# Altium PCB 12zb.PcbDoc
Units mil, origin at the board's own origin, x right, y up, seen from the top; angles counter-clockwise.
Board outline 2485 x 2100 mil, 2 copper layers (Top Layer, Bottom Layer); 77 components, 107 nets, 329 pads, 73 vias.
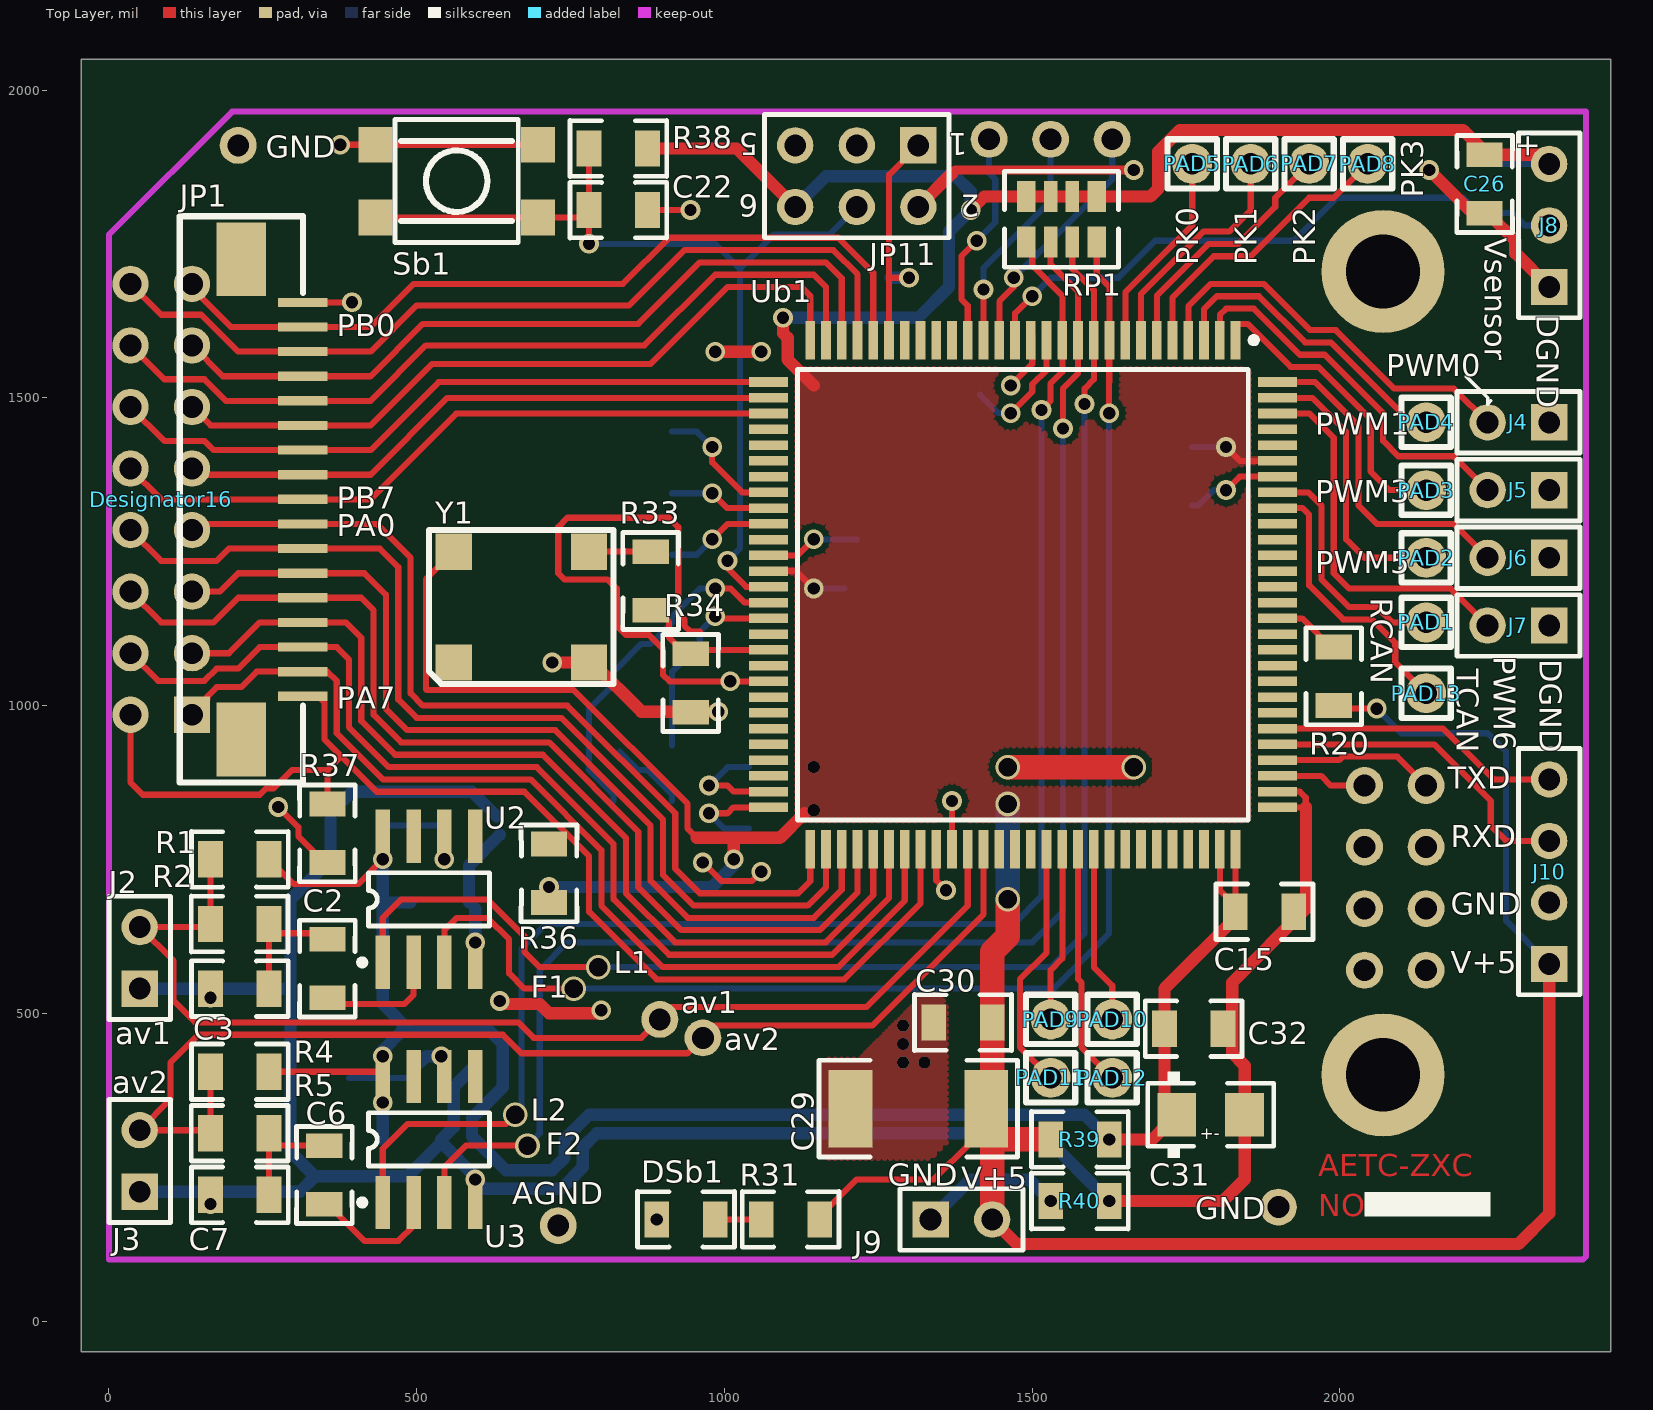
[diagram p0: Top Layer view]
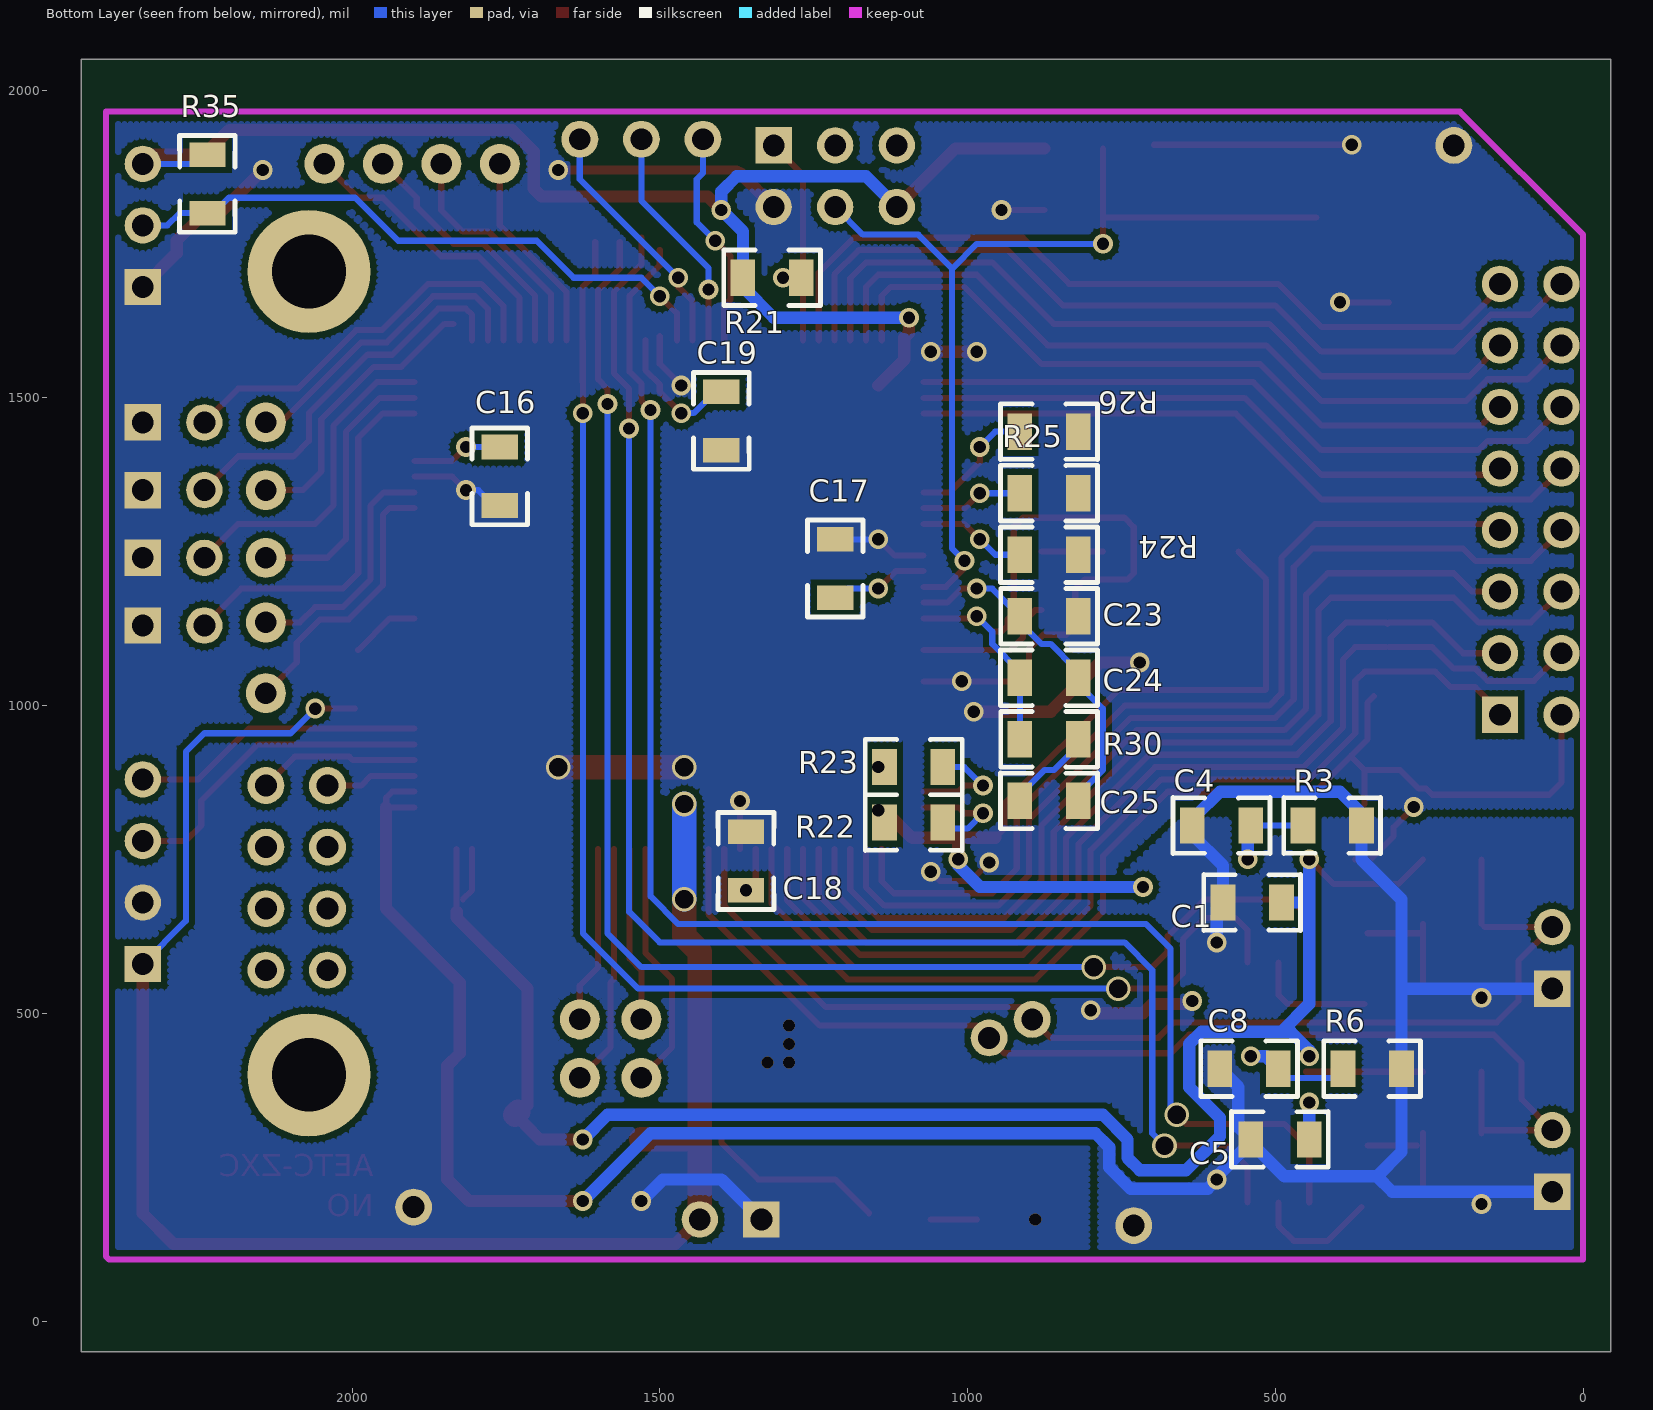
[diagram p1: Bottom Layer view, seen from below]

## Layer stack, top to bottom
Top Layer: signal copper 1.4
Dielectric: dielectric 12.6, FR-4, Dk 4.8
Bottom Layer: signal copper 1.4

## Board outline
-45,-45 -45,2050 2440,2050 2440,-50 -45,-50

## Design rules (kind name [scope] priority, off if disabled: settings)
Clearance [All] p1: gap=10
ComponentClearance [All] p1: gap=0 collisioncheckmode=0
PolygonConnect [All] p1: connectstyle=Direct reliefconductorwidth=10 reliefentries=4 polygonreliefangle="90 Angle"
RoutingLayers [All] p1: top layer=Horizontal bottom layer=Vertical
RoutingVias [All] p1: holewidth=28 width=50 viastyle="Through Hole" minholewidth=28 minwidth=50 maxholewidth=28 maxwidth=50
SolderMaskExpansion [All] p1: expansion=4
TestPointUsage [All] p1: valid=0 allowmultiple=FALSE
Testpoint [All] p1: side=15 testpointundercomponent=TRUE minsize=40 maxsize=100 preferedsize=60 minholesize=0 maxholesize=40 preferedholesize=32 testpointgrid=1 style=1023 order=1234567890
Width [All] p1: maxlimit=40 minlimit=10 preferedwidth=10 toplayer_prefwidth=20 minimp=50.000000 maximp=50.000000 favimp=50.000000
16 further rules are at their usual default settings.

## Components (designator, comment, footprint, x,y, rotation, side; value= is the part's Value field where it differs from the comment)
C1 "Cap" CR2012-0805 535,680 r0 bottom
C2 "Cap" CR2012-0805 355,575 r270 top
C3 "Cap" CR2012-0805 210,540 r0 top
C4 "Cap" CR2012-0805 590,805 r180 bottom
C5 "Cap" CR2012-0805 490,295 r0 bottom
C6 "Cap" CR2012-0805 350,240 r270 top
C7 "Cap" CR2012-0805 210,205 r0 top
C8 "Cap" CR2012-0805 545,410 r180 bottom
C15 "Cap" CR2012-0805 1875,665 r0 top
C16 "Cap" CR2012-0805 1760,1375 r270 bottom
C17 "Cap" CR2012-0805 1215,1220 r90 bottom
C18 "Cap" CR2012-0805 1360,750 r270 bottom
C19 "Cap" CR2012-0805 1400,1460 r90 bottom
C22 "Cap" CR2012-0805 825,1805 r0 top
C23 "Cap" CR2012-0805 870,1145 r180 bottom
C24 "Cap" CR2012-0805 865,1045 r0 bottom
C25 "Cap" CR2012-0805 865,845 r0 bottom
C26 "Cap" CR2012-0805 2235,1850 r270 top
C29 "Cap Pol2" CR6332-2512 1315,345 r180 top
C30 "Cap" CR2012-0805 1385,485 r0 top
C31 "Cap Pol2" C3216-1206-TA-YX1 1790,335 r0 top
C32 "Cap" CR2012-0805 1765,475 r180 top
Designator16 "Comment" HDR2x16 80,1335 r270 top
DSb1 "LED1" CR2012-0805 940,165 r180 top
J2 "Header 2" HDR1X2 50,540 r90 top (schematic designator JP2)
J3 "Header 2" HDR1X2 50,210 r90 top
J4 "Header 2" HDR1X2 2340,1460 r180 top (schematic designator JP4)
J5 "Header 2" HDR1X2 2340,1350 r180 top (schematic designator JP5)
J6 "Header 2" HDR1X2 2340,1240 r180 top
J7 "Header 2" HDR1X2 2340,1130 r180 top
J8 "Header 3" HDR1X3 2340,1680 r90 top (schematic designator JPa2)
J9 "Header 2" HDR1X2 1335,165 r0 top
J10 "Header 4" HDR1X4 2340,580 r90 top
JP1 "Header 17" Ts1x17 315,1335 r270 top
JP11 "CON3X2-B1" HDR2X3 1315,1910 r180 top (schematic designator JPb4)
PAD1 "PAD-YX1" PAD-TEST-YX1 2140,1135 r90 top
PAD2 "PAD-YX1" PAD-TEST-YX1 2140,1240 r90 top
PAD3 "PAD-YX1" PAD-TEST-YX1 2140,1350 r90 top
PAD4 "PAD-YX1" PAD-TEST-YX1 2140,1460 r90 top
PAD5 "PAD-YX1" PAD-TEST-YX1 1760,1880 r90 top
PAD6 "PAD-YX1" PAD-TEST-YX1 1855,1880 r90 top
PAD7 "PAD-YX1" PAD-TEST-YX1 1950,1880 r90 top
PAD8 "PAD-YX1" PAD-TEST-YX1 2045,1880 r90 top
PAD9 "PAD-YX1" PAD-TEST-YX1 1530,490 r90 top (schematic designator PAD8)
PAD10 "PAD-YX1" PAD-TEST-YX1 1630,490 r90 top
PAD11 "PAD-YX1" PAD-TEST-YX1 1530,395 r90 top
PAD12 "PAD-YX1" PAD-TEST-YX1 1630,395 r90 top
PAD13 "PAD-YX1" PAD-TEST-YX1 2140,1020 r90 top (schematic designator PAD1)
R1 "Res3" CR2012-0805 210,750 r0 top
R2 "Res3" CR2012-0805 215,645 r180 top
R3 "Res3" CR2012-0805 405,805 r0 bottom
R4 "Res3" CR2012-0805 210,405 r0 top
R5 "Res3" CR2012-0805 215,305 r180 top
R6 "Res3" CR2012-0805 340,410 r0 bottom
R20 "3.3k" CR2012-0805 1990,1045 r90 top
R21 "3.3k" CR2012-0805 1320,1695 r180 bottom
R22 "3.3k" CR2012-0805 1090,810 r180 bottom
R23 "3.3k" CR2012-0805 1090,900 r180 bottom
R24 "3.3k" CR2012-0805 865,1245 r0 bottom
R25 "3.3k" CR2012-0805 865,1345 r0 bottom
R26 "3.3k" CR2012-0805 865,1445 r0 bottom
R30 "3.3k" CR2012-0805 870,945 r180 bottom
R31 "3.3k" CR2012-0805 1105,165 r0 top
R33 "470" CR2012-0805 880,1205 r270 top
R34 "470" CR2012-0805 945,1039.25 r270 top
R35 "Res2" CR2012-0805 2235,1845 r90 bottom
R36 "Res3" CR2012-0805 715,730 r270 top
R37 "Res3" CR2012-0805 355,795 r270 top
R38 "3.3k" CR2012-0805 825,1905 r0 top
R39 "3.3k" CR2012-0805 1580,295 r180 top
R40 "3.3k" CR2012-0805 1580,195 r180 top
RP1 "RESP4_YX1" RP4_YX1 1495,1790 r90 top (schematic designator RPb2)
Sb1 "SW-PB-B1" SW2-4-B1 525,1860 r180 top
U2 "LM1881M" SO-8 520,685 r0 top
U3 "LM1881M" SO-8 520,295 r0 top
Ub1 "MC9S12DG128BCPV" 987-01 1485,1180 r270 top
Y1 "XTAL" XYT 670,1160 r0 top (schematic designator Yb1)

## Footprints (in the part's own frame and the unit in brackets; to place one, negate y for a bottom-side part, rotate by r counter-clockwise, add the part's x,y. Pads: shape width x height; smd on the part's side, far side on the other; paste and mask are expansions set on the pad)
987-01 [mm] "QFP; 112 Leads; Body 20 x 20 mm; Pitch 0.65 mm"
  rect 1.6x0.4 smd: 1(-10.5,8.775) 2(-10.5,8.125) 3(-10.5,7.475) 4(-10.5,6.825) 5(-10.5,6.175) 6(-10.5,5.525) 7(-10.5,4.875) 8(-10.5,4.225) 9(-10.5,3.575) 10(-10.5,2.925) 11(-10.5,2.275) 12(-10.5,1.625) 13(-10.5,0.975) 14(-10.5,0.325) 15(-10.5,-0.325) 16(-10.5,-0.975) 17(-10.5,-1.625) 18(-10.5,-2.275) 19(-10.5,-2.925) 20(-10.5,-3.575) 21(-10.5,-4.225) 22(-10.5,-4.875) 23(-10.5,-5.525) 24(-10.5,-6.175) 25(-10.5,-6.825) 26(-10.5,-7.475) 27(-10.5,-8.125) 28(-10.5,-8.775) 57(10.5,-8.775) 58(10.5,-8.125) 59(10.5,-7.475) 60(10.5,-6.825) 61(10.5,-6.175) 62(10.505,-5.525) 63(10.5,-4.875) 64(10.5,-4.225) 65(10.5,-3.575) 66(10.5,-2.925) 67(10.5,-2.275) 68(10.5,-1.625) 69(10.5,-0.975) 70(10.5,-0.325) 71(10.5,0.325) 72(10.5,0.975) 73(10.5,1.625) 74(10.5,2.275) 75(10.5,2.925) 76(10.5,3.575) 77(10.5,4.225) 78(10.5,4.875) 79(10.5,5.525) 80(10.5,6.175) 81(10.5,6.825) 82(10.5,7.475) 83(10.5,8.125) 84(10.5,8.775)
  rect 0.4x1.6 smd: 29(-8.775,-10.5) 30(-8.125,-10.5) 31(-7.475,-10.5) 32(-6.825,-10.5) 33(-6.175,-10.5) 34(-5.525,-10.5) 35(-4.875,-10.5) 36(-4.225,-10.5) 37(-3.575,-10.5) 38(-2.925,-10.5) 39(-2.275,-10.5) 40(-1.625,-10.5) 41(-0.975,-10.5) 42(-0.325,-10.5) 43(0.325,-10.5) 44(0.975,-10.5) 45(1.625,-10.5) 46(2.275,-10.5) 47(2.925,-10.5) 48(3.575,-10.5) 49(4.225,-10.5) 50(4.875,-10.5) 51(5.525,-10.5) 52(6.175,-10.5) 53(6.825,-10.5) 54(7.475,-10.5) 55(8.125,-10.5) 56(8.775,-10.5) 85(8.775,10.5) 86(8.125,10.5) 87(7.475,10.5) 88(6.825,10.5) 89(6.175,10.5) 90(5.525,10.5) 91(4.875,10.5) 92(4.225,10.5) 93(3.575,10.5) 94(2.925,10.5) 95(2.275,10.5) 96(1.625,10.5) 97(0.975,10.5) 98(0.325,10.5) 99(-0.325,10.5) 100(-0.975,10.5) 101(-1.625,10.5) 102(-2.275,10.5) 103(-2.925,10.5) 104(-3.575,10.5) 105(-4.225,10.5) 106(-4.875,10.5) 107(-5.525,10.5) 108(-6.175,10.5) 109(-6.825,10.5) 110(-7.475,10.5) 111(-8.125,10.5) 112(-8.775,10.5)
  silkscreen extent -10.63,-9.3 9.3,9.65
C3216-1206-TA-YX1 [mm]
  rect 1.6x1.8 smd: 1(-1.4,0) 2(1.4,0)
  silkscreen extent -2.6,-1.78 2.6,1.78
CR2012-0805 [mil]
  rect 40x59.05 smd: 1(-45,0) 2(50,0)
  silkscreen extent -76,-45 81,45
CR6332-2512 [mm]
  rect 1.8x3.2 smd: 1(-2.8,0) 2(2.8,0)
  silkscreen extent -4.1,-2 4.1,2
HDR1X2 [mm] "Connector; Header; 2 Position"
  rect 1.5x1.5 hole 0.9: 1(0,0)
  round 1.5 hole 0.9: 2(2.54,0)
  silkscreen extent -1.27,-1.27 3.81,1.27
HDR1X3 [mm] "Connector; Header; 3 Position"
  rect 1.5x1.5 hole 0.9: 1(0,0)
  round 1.5 hole 0.9: 2(2.54,0) 3(5.08,0)
  silkscreen extent -1.27,-1.27 6.35,1.27
HDR1X4 [mm] "Connector; Header; 4 Position"
  rect 1.5x1.5 hole 0.9: 1(0,0)
  round 1.5 hole 0.9: 2(2.54,0) 3(5.08,0) 4(7.62,0)
  silkscreen extent -1.27,-1.27 8.89,1.27
HDR2X3 [mm] "Connector; Header; 3x2 Position"
  rect 1.5x1.5 hole 0.9: 1(0,0)
  round 1.5 hole 0.9: 2(0,2.54) 3(2.54,0) 4(2.54,2.54) 5(5.08,0) 6(5.08,2.54)
  silkscreen extent -1.27,-1.27 6.35,3.81
HDR2x16 [mm]
  rect 1.5x1.5 hole 0.9: 1(8.89,1.397)
  round 1.5 hole 0.9: 2(8.89,-1.143) 3(6.35,1.397) 4(6.35,-1.143) 5(3.81,1.397) 6(3.81,-1.143) 7(1.27,1.397) 8(1.27,-1.143) 9(-1.27,1.397) 10(-1.27,-1.143) 11(-3.81,1.397) 12(-3.81,-1.143) 13(-6.35,1.397) 14(-6.35,-1.143) 15(-8.89,1.397) 16(-8.89,-1.143)
PAD-TEST-YX1 [mil]
  round 65 hole 35: 1(0,0)
  silkscreen extent -40,-40 40,40
RP4_YX1 [mil]
  rect 50x30 smd: 1(-37,5) 4(-37,-110) 5(37,-110) 8(37,5)
  rect 50x22 smd: 2(-37,-35) 3(-37,-70) 6(37,-70) 7(37,-35)
  silkscreen extent -78,-145 78,40
SO-8 [mm]
  rect 0.6x2.2 smd: 1(-1.906,-2.6) 2(-0.636,-2.6) 3(0.634,-2.6) 4(1.904,-2.6) 5(1.904,2.6) 6(0.634,2.6) 7(-0.636,2.6) 8(-1.906,2.6)
  silkscreen extent -2.88,-2.72 2.5,1.1
SW2-4-B1 [mil]
  rect 55x58 smd: 1(-172,67) 2(-172,-51) 3(92,-51) 4(92,67)
  silkscreen extent -140,-92 60,108
Ts1x17 [mil]
  rect 120x80 smd: 0(-390,-100) 0(390,-100)
  rect 15x80 smd: 1(-320,0) 2(-280,0) 3(-240,0) 4(-200,0) 5(-160,0) 6(-120,0) 7(-80,0) 8(-40,0) 9(0,0) 10(40,0) 11(80,0) 12(120,0) 13(160,0) 14(200,0) 15(240,0) 16(280,0) 17(320,0)
  silkscreen extent -460,-200 460,0
XYT [mil]
  rect 59.06x59.06 smd: 1(-110,-90) 2(110,-90) 3(110,90) 4(-110,90)
  silkscreen extent -150,-125 150,125

## Part data
C1 C2 C3 C4 C5 C6 C7 C8 C15 C16 C17 C18 C19 C22 C23 C24 C25 C26 C30 C32: "Capacitor"
C29 C31: "Polarized Capacitor (Axial)"
DSb1: "Typical RED GaAs LED"
J2 J3 J4 J5 J6 J7 J9: "Header, 2-Pin"
J8: "Header, 3-Pin"
J10: "Header, 4-Pin"
JP1: "Header, 17-Pin"
JP11: "Header, 6-Pin, Dual row"
PAD1 PAD2 PAD3 PAD4 PAD5 PAD6 PAD7 PAD8 PAD9 PAD10 PAD11 PAD12 PAD13: "Electrical Bell"
R1 R2 R3 R4 R5 R6 R35 R36 R37 RP1: "Resistor"
R20 R21 R22 R23 R24 R25 R26 R30 R31 R33 R34 R38 R39 R40: library part RES2
Sb1: "Switch"
U2 U3: "Video Sync Separator"
Ub1: "16-Bit Microcontroller"
Y1: "Crystal Oscillator"

## Free pads (board coordinates)
  round 60 hole 35.43: 0(895,490) 0(2040,870) 1(730,155) 1(965,460) 1(2140,870) 2(1430,1920) 2(2040,770) 3(1530,1920) 3(2140,770) 4(1630,1920) 4(2040,670) 5(2140,670) 6(2040,570) 7(210,1910) 7(1900,185) 7(2140,570)
  round 200 hole 120: 0(2070,400) 0(2070,1705)

## Via types
v1: diameter 32, hole 20, Top Layer to Bottom Layer, 58 vias
v2: diameter 40, hole 30, Top Layer to Bottom Layer, 8 vias
v3: diameter 20, hole 20, Top Layer to Bottom Layer, 7 vias

## Nets (pads, with @x,y where several pads share a name; then routed paths per layer and width w, separated by ;. In a path a pad name is that pad's centre, name@x,y a point inside that pad or via, vN(x,y) a via of type N, cw(c..) or ccw(c..) an arc to the next point about the centre after c; other vN are vias at no path point)
AGND: C1.2 C3.1 C4.1 C5.2 C7.1 C8.1 C15.2 C31.2 C32.1 J2.1 J3.1 pad.1@730,155 R3.1 R6.1 R40.1 U2.4 U3.4 Ub1.85 Ub1.86 | length 4248.4
  Top Layer w10: Ub1.85 1944.53,834.53 1944.53,850.47 1934.88,860.12 Ub1.86 ; 1944.53,835.47 1945,835
  Top Layer w20: v1(1625,195) 1810,195 1845.12,230.12 1845.12,414.88 1825,435 1825,550 1945,670 1945,835
  Bottom Layer w20: J3.1 310,210 335,235 ; J2.1 295,540 ; C5.2@545,285 v1@595,235 ; C1.2 585,740 C4.1@635,790 ; C8.1 560,380 560,315 C5.2 540,290 485,235 335,235 ; v1(595,230) 610,215 735,215 770,250 770,282.57 792.43,305 1515,305 v1(1625,195) ; v1(595,615) C1.2@595,670 ; C4.1@630,820 590,860 395,860 360,825 360,750 295,685 295,275 335,235
  other v1: 165,190 165,525
BKGD: JP11.1 R21.2 Ub1.23 | length 398.8
  Top Layer w10: Ub1.23 1267.48,1862.48 JP11.1 ; 1267.48,1695 v1(1300,1695)
  Bottom Layer w20: R21.2 v1(1300,1695)
COM_SIG1: RP1.3 U2.1 Ub1.10 | length 2451.6
  Top Layer w10: U2.1 444.95,654.95 475,685 615,685 675,625 675,600 700,575 v2(795,575) ; RP1.3 1565,1710 1600.16,1674.84 1600.16,1530 1585,1514.84 v1(1585,1490)
  Bottom Layer w10: v2(795,575) 1530,575 1585,630 v1(1585,1490)
COM_SIG2: RP1.1 U3.1 Ub1.12 | length 2563.9
  Top Layer w10: U3.1 444.95,279.95 485,320 645,320 v2(660,335) ; RP1.1@1500,1740 1500,1715 1548.98,1666.02 1548.98,1542.26 1530,1523.28 1530,1495 v1(1515,1480)
  Bottom Layer w10: v2(660,335) 670,345 670,605 710,645 1470,645 1515,690 v1(1515,1480)
DGND: C16.2 C17.2 C18.1 C19.1 C22.2 C23.2 C26.2 C29.2 C30.1 DSb1.2 J4.1 J5.1 J6.1 J7.1 J8.1 J9.1 J10.2 JP1.1 JP11.2 pad.7@210,1910 pad.7@1900,185 R24.1 R25.1 R26.1 R34.2 R37.2 R40.2 Sb1.2 Sb1.3 Ub1.14 Ub1.40 Ub1.48 Ub1.66 Ub1.106 Y1.2 | length 3855.7
  Top Layer w10: v1(275,835) 307.74,802.26 307.74,787.26 345,750 R37.2@355,750 ; JP1.1 v1(395,1655) ; R37.2@357.5,752.5 360,750 R37.2@370,750 ; v1(376,1911) Sb1.2 ; C22.2 v1(945,1805) ; 960,1120 945,1120 935,1130 935,1140 925,1150 925,1290 910,1305 745,1305 730,1290 730,1215 740,1205 810,1205 825,1190 825,1130 840,1115 877.15,1115 900,1092.15 900,1050 910.75,1039.25 Ub1.48 ; v1(965,745) 995,715 1045,715 v1(1060,730) ; Ub1.40 1118.98,1243.98 v1(1145,1270) ; Ub1.66 v1(1369.84,844.84) ; v1(1465,1520) 1500,1555 Ub1.14@1500,1600 ; v1(1815,1350) 1836.93,1371.93 Ub1.106
  Top Layer w15: JP11.2 1375,1870 v1(1665,1870) v1@1670,1870
  Top Layer w20: v1(635,520) 640,515 700,515 715,500 v1@795,500 ; v1(720,1070) 785,1070 865,990 v1(990,990) ; v1(985,1575) v1(1060,1575) ; JP11.2 1370,1865 ; v1(2145,1870) C26.2@2215,1800 ; C26.2@2245,1795 2285,1755 2285,1735 J8.1
  Top Layer w40: v2(1460,900) v2(1665,900)
  Bottom Layer w10: v1(1145,1270) C17.2 ; C16.2 1770,1325 1795,1350 v1(1815,1350)
  Bottom Layer w20: J9.1 1400,230 1495,230 v1(1530,195)
  other v1: 800,505 1009.25,1039.25
  other v3: 890,165 1290,420 1325,420 1290,450 1290,480
EXTAL: R33.2 R34.1 Ub1.46 | length 207.3
  Top Layer w10: R33.2 890,1155 910,1135 910,1110.43 R34.1@930,1090.43 ; R34.1@955.43,1090.43 Ub1.46
MOTOR_CTL: J4.2 Ub1.4 | length 649.8
  Top Layer w10: Ub1.4 1753.7,1648.7 1790,1685 1876.57,1685 1951.57,1610 1993.28,1610 2088.28,1515 2185,1515 J4.2
NetC2_1: C2.1 C3.2 R2.1 | length 195
  Top Layer w10: C3.2 R2.1 ; R2.1@260,630 C2.1@350,630
NetC2_2: C2.2 U2.2 | length 198.8
  Top Layer w10: C2.2@355,515 480,515 494.95,529.95 U2.2
NetC4_2: C4.2 R3.2 U2.6 | length 185
  Top Layer w10: v1(545,750) U2.6@545,800
  Bottom Layer w10: R3.2 C4.2
  Bottom Layer w20: v1(545,750) C4.2@545,800
NetC6_1: C6.1 C7.2 R5.1 | length 180
  Top Layer w10: C7.2 R5.1 ; R5.1@270,285 C6.1
NetC6_2: C6.2 U3.2 | length 205.7
  Top Layer w10: C6.2@360,185 415,130 469.95,130 494.95,155 U3.2
NetC8_2: C8.2 R6.2 U3.6 | length 158.3
  Bottom Layer w10: R6.2@390,395 C8.2@495,395
  Bottom Layer w20: C8.2 515,430 v1(540,430)
NetC18_2: C18.2 Ub1.65 | length 73.1
  Top Layer w10: Ub1.65 1344.25,715.75 v1(1360,700)
NetC19_2: C19.2 Ub1.13 | length 205
  Top Layer w10: v1(1465,1475) 1500,1510 1500,1521.57 1523.39,1544.95 Ub1.13
  Bottom Layer w10: C19.2@1415,1505 1445,1475 v1(1465,1475)
NetC25_2: C25.2 R30.2 | length 124
  Bottom Layer w10: R30.2@830,925 860,895 875,895 915,855 C25.2
NetDSb1_1: DSb1.1 R31.1 | length 75
  Top Layer w10: DSb1.1 R31.1
NetPAD1_1: Ub1.109
NetPAD2_1: PAD2.1 Ub1.111 | length 451.8
  Top Layer w10: Ub1.111 1955.12,1499.88 2010,1445 2010,1270 2040,1240 PAD2.1
NetPAD3_1: PAD3.1 Ub1.1 | length 466.6
  Top Layer w10: Ub1.1@1835,1620 1850,1620 1920,1550 1965,1550 2050,1465 2050,1380 2080,1350 PAD3.1
NetPAD4_1: PAD4.1 Ub1.3 | length 505.1
  Top Layer w10: Ub1.3 1779.29,1644.29 1800,1665 1868.28,1665 1943.28,1590 1985,1590 2115,1460 PAD4.1
NetPAD5_1: PAD5.1 Ub1.8 | length 331.6
  Top Layer w10: Ub1.8 1651.34,1671.34 1760,1780 PAD5.1
NetPAD6_1: PAD6.1 Ub1.7 | length 384.8
  Top Layer w10: Ub1.7 1676.93,1668.65 1778.28,1770 1820,1770 1855,1805 PAD6.1
NetPAD7_1: PAD7.1 Ub1.6 | length 417.5
  Top Layer w10: Ub1.6 1702.52,1665.95 1786.57,1750 1835,1750 1895,1810 1895,1825 PAD7.1
NetPAD8_1: PAD8.1 Ub1.5 | length 476.5
  Top Layer w10: Ub1.5 1728.11,1663.11 1795,1730 1855,1730 1950,1825 1990,1825 PAD8.1
NetPAD9_1: PAD9.1 Ub1.73 | length 284.5
  Top Layer w10: PAD9.1 1530,570 1548.98,588.98 Ub1.73
NetPAD10_1: PAD10.1 Ub1.75 | length 289
  Top Layer w10: Ub1.75 1600.16,574.84 1630,545 PAD10.1
NetPAD11_1: PAD11.1 Ub1.72 | length 410.3
  Top Layer w10: Ub1.72 1523.39,598.39 1480,555 1480,445 PAD11.1
NetPAD12_1: PAD12.1 Ub1.74 | length 394.6
  Top Layer w10: Ub1.74 1574.57,555.43 1580,550 1580,445 PAD12.1
NetR20_2: R20.2 Ub1.97 | length 113
  Top Layer w10: Ub1.97 1938.39,1141.61 R20.2@1990,1090
NetR22_2: R22.2 Ub1.56 | length 175.9
  Top Layer w10: v1(975,825) 1005,825 1014.53,834.53 Ub1.56
  Bottom Layer w10: v1(975,825) 1000,800 R22.2@1040,800
NetR23_2: R23.2 Ub1.55 | length 178.1
  Top Layer w10: v1(975,870) 1005,870 1014.88,860.12 Ub1.55
  Bottom Layer w10: v1(975,870) 1005,900 R23.2
NetR24_2: R24.2 Ub1.38 | length 177.4
  Top Layer w10: v1(980,1270) 1005.16,1295.16 Ub1.38
  Bottom Layer w10: R24.2 955,1245 v1(980,1270)
NetR25_2: R25.2 Ub1.37 | length 166.7
  Top Layer w10: v1(980,1345) 1004.25,1320.75 Ub1.37
  Bottom Layer w10: R25.2 v1(980,1345)
NetR26_2: R26.2 Ub1.36 | length 212.1
  Top Layer w10: v1(980,1420) 980,1395 1028.66,1346.34 Ub1.36
  Bottom Layer w10: R26.2 955,1445 v1(980,1420)
NetR33_1: R33.1 Y1.3 | length 100
  Top Layer w10: Y1.3 R33.1
O/E_SIG1: U2.7
O/E_SIG2: U3.7
PA0: Designator16.7 JP1.10 Ub1.57 | length 1479.8
  Top Layer w10: Designator16.7@150,1295 435,1295 490,1240 490,1020 510,1000 745,1000 920,825 920,735 960,695 1120,695 1139.53,714.53 Ub1.57
PA1: Designator16.8 JP1.11 Ub1.58 | length 1652
  Top Layer w10: Designator16.8 85,1235 175,1235 195,1255 440,1255 470,1225 470,1010 500,980 735,980 900,815 900,725 950,675 1135,675 1165.12,705.12 Ub1.58
PA2: Designator16.5 JP1.12 Ub1.59 | length 1546
  Top Layer w10: Designator16.5 180,1185 210,1215 415,1215 450,1180 450,995 485,960 725,960 880,805 880,715 940,655 1145,655 1190.71,700.71 Ub1.59
PA3: Designator16.6 JP1.13 Ub1.60 | length 1690.3
  Top Layer w10: Designator16.6 85,1135 170,1135 210,1175 410,1175 430,1155 430,985 475,940 715,940 860,795 860,705 930,635 1155,635 1216.3,696.3 Ub1.60
PA4: Designator16.3 JP1.14 Ub1.61 | length 1579.9
  Top Layer w10: Designator16.3 195,1085 245,1135 JP1.14 JP1.14@317.5,1132.5 ; JP1.14@320,1135 385,1135 410,1110 410,975 465,920 705,920 840,785 840,695 920,615 1165,615 1241.89,691.89 Ub1.61
PA5: Designator16.4 JP1.15 Ub1.62 | length 1710.4
  Top Layer w10: Designator16.4 80,1040 155,1040 175,1060 210,1060 245,1095 JP1.15 ; JP1.15@320,1095 370,1095 390,1075 390,965 455,900 695,900 820,775 820,685 910,595 1175,595 1267.48,687.48 Ub1.62
PA6: Designator16.1 JP1.16 Ub1.63 | length 1655
  Top Layer w10: Designator16.1@160,1010 Designator16.1 135,990 175,1030 215,1030 240,1055 355,1055 370,1040 370,955 445,880 685,880 800,765 800,675 900,575 1185,575 1293.07,683.07 Ub1.63
PA7: Designator16.2 JP1.17 R36.1 R37.1 Ub1.64 | length 1938.5
  Top Layer w10: Designator16.2 35,875 55,855 245,855 255,865 267.19,865 297.19,895 355,895 ; JP1.17@340,1015 350,1005 350,945 435,860 675,860 780,755 780,665 890,555 1195,555 1318.66,678.66 Ub1.64 ; R37.1 355,895 ; 376.49,918.51 376.49,916.49 355,895
PAD01: Ub1.69
PAD02: Ub1.71
PAD05: Ub1.77
PAD06: Ub1.79
PAD07: Ub1.81
PAD9: Ub1.70
PAD12: Ub1.76
PAD13: Ub1.78
PAD14: Ub1.80
PAD15: Ub1.82
PB0: Designator16.15 JP1.2 Ub1.24 | length 1331.2
  Top Layer w10: Designator16.15@135,1678.28 198.28,1615 425,1615 495,1685 835,1685 910,1760 1185,1760 1241.89,1703.11 Ub1.24 ; Designator16.15 Designator16.15@138.36,1681.64
PB1: Designator16.16 JP1.3 Ub1.25 | length 1418.6
  Top Layer w10: Designator16.16 85,1635 150,1635 210,1575 425,1575 500,1650 845,1650 935,1740 1176.72,1740 1216.3,1700.42 Ub1.25
PB2: Designator16.13 JP1.4 Ub1.26 | length 1264.6
  Top Layer w10: Designator16.13 185,1535 425,1535 510,1620 860,1620 960,1720 1165,1720 1190.71,1694.29 Ub1.26
PB3: Designator16.14 JP1.5 Ub1.27 | length 1347.1
  Top Layer w10: Designator16.14 90,1530 155,1530 190,1495 425,1495 515,1585 870,1585 985,1700 1145,1700 1165.12,1679.88 Ub1.27
PB4: Designator16.11 JP1.6 Ub1.28 | length 1188.3
  Top Layer w10: Designator16.11 165,1455 425,1455 525,1555 880,1555 1005,1680 1125,1680 1139.53,1665.47 Ub1.28
PB5: Designator16.12 JP1.7 Ub1.29 | length 1111.4
  Top Layer w10: Designator16.12 90,1430 155,1430 170,1415 425,1415 535.47,1525.47 Ub1.29
PB6: Designator16.9 JP1.8 Ub1.30 | length 978.3
  Top Layer w10: Designator16.9@145,1375 425,1375 549.88,1499.88 Ub1.30
PB7: Designator16.10 JP1.9 Ub1.31 | length 1115
  Top Layer w10: Designator16.10 85,1335 425,1335 564.29,1474.29 Ub1.31
PH0: Ub1.52
PH1: Ub1.51
PH2: Ub1.50
PH3: Ub1.49
PH4: Ub1.35
PH5: Ub1.34
PH6: Ub1.33
PH7: Ub1.32
PJ0: Ub1.22
PJ1: Ub1.21
PM0: PAD1.1 Ub1.105 | length 399.4
  Top Layer w10: Ub1.105 1948.66,1346.34 1970,1325 1970,1205 2015,1160 2060,1160 2085,1135 PAD1.1
PM1: PAD13.1 Ub1.104 | length 452.1
  Top Layer w10: Ub1.104 1939.25,1320.75 1950,1310 1950,1195 2005,1140 2051.72,1140 2090,1101.72 2090,1070 PAD13.1
PM2: Ub1.103
PM3: Ub1.102
PM4: Ub1.101
PM5: Ub1.100
PM6: pad.1@2140,870 Ub1.88 | length 263.4
  Top Layer w10: Ub1.88 1998.7,911.3 2004.29,916.89 2093.11,916.89 pad.1@2140,870
PM7: pad.0@2040,870 Ub1.87 | length 148.1
  Top Layer w10: Ub1.87 1969.29,885.71 1985,870 pad.0@2040,870
PS2: Ub1.91
PS3: Ub1.92
PS4: Ub1.93
PS5: Ub1.94
PS6: Ub1.95
PS7: Ub1.96
PT5: pad.4@1630,1920 Ub1.16 | length 402.6
  Top Layer w10: Ub1.16 1446.61,1656.61 1470,1680 v1(1470,1695)
  Bottom Layer w10: v1(1470,1695) 1630,1855 pad.4@1630,1920
PT6: pad.3@1530,1920 Ub1.17 | length 371.8
  Top Layer w10: Ub1.17 v1(1421.02,1676.02)
  Bottom Layer w10: v1(1421.02,1676.02) 1421.02,1711.02 1530,1820 pad.3@1530,1920
PT7: pad.2@1430,1920 Ub1.18 | length 357.9
  Top Layer w10: Ub1.18 1395.43,1649.57 1385,1660 1385,1730 v1(1410,1755)
  Bottom Layer w10: v1(1410,1755) 1440,1785 1440,1855 1430,1865 pad.2@1430,1920
PWM4: J6.2 Ub1.112 | length 536
  Top Layer w10: Ub1.112 1959.53,1525.47 2030,1455 2030,1325 2060,1295 2185,1295 J6.2
PWM6: J7.2 Ub1.110 | length 613.1
  Top Layer w10: Ub1.110 1950.71,1474.29 1990,1435 1990,1215 2015,1190 2180,1190 J7.2
RST: C22.1 JP11.4 R38.1 Sb1.1 Sb1.4 Ub1.42 | length 1566.2
  Top Layer w10: Sb1.4 C22.1@777,1793 ; v1(780,1750) R38.1 ; v1(1005,1235) 1005,1223.28 1035.49,1192.8 Ub1.42
  Bottom Layer w10: v1(780,1750) 985,1750 1025,1710 ; v1(1005,1235) 1025,1255 1025,1710 ; JP11.4 1170,1765 1080,1765 1025,1710
RXD: J10.3 Ub1.89 | length 530
  Top Layer w10: Ub1.89 2153.11,936.89 2245,845 2245,805 2270,780 J10.3
STEER_CTL: J5.2 Ub1.2 | length 629.4
  Top Layer w10: Ub1.2 1804.88,1634.88 1815,1645 1860,1645 1935,1570 1975,1570 2070,1475 2070,1430 2095,1405 2185,1405 J5.2
TXD: J10.4 Ub1.90 | length 475.8
  Top Layer w10: Ub1.90 2167.52,962.48 2250,880 J10.4
V+5A: C1.1 C5.1 C15.1 C31.1 C32.2 R1.2 R4.2 R39.1 U2.8 U3.8 Ub1.83 Ub1.84 | length 2991.4
  Top Layer w10: R4.2 U3.8@450,405 ; R1.2 300,710 405,710 v1(445,750) ; Ub1.83 1804.88,700.12 C15.1@1820,685 ; C15.1@1830.47,665.47 Ub1.84
  Top Layer w20: v1(1625,295) 1695,295 C31.1@1720,320 ; C31.1@1715,350 1715,540 1830,655 C15.1
  Top Layer w40: C31.1@1729.94,339.94 C31.1
  Bottom Layer w20: C5.1 v1(445,355) ; v1@445,440 475,470 620,470 640,450 640,380 590,330 590,300 645,245 720,245 740,265 740,295 780,335 1585,335 v1(1625,295) ; 445,680 C1.1 ; v1(445,750) 445,515 490,470
  other v1: 445,430
V+5D: C16.1 C17.1 C26.1 C29.1 C30.2 J8.3 J9.2 J10.1 JP11.6 R20.1 R21.1 R22.1 R23.1 R31.2 R35.2 R36.2 R38.2 R39.2 RP1.5 RP1.6 RP1.7 RP1.8 Ub1.41 Ub1.107 Y1.4 | length 7072.8
  Top Layer w10: 515,1025.94 515,1205 Y1.4 ; 515.94,1025 755,1025 940,840 940,800 955,785 ; Ub1.41 1116.61,1218.39 v1(1145,1190) ; R31.2@1160,175 1215,230 1340,230 1400,290 C29.1@1400,295 ; v1(1815,1420) 1837.48,1397.52 Ub1.107 ; R20.1@1995,995 v1(2060,995)
  Top Layer w20: R38.2 1020,1905 JP11.6 ; 955,785 1090,785 1130,825 ; v1(1015,750) 1015,785 ; v1(1095,1630) 1095,1605 1102.72,1597.28 1102.72,1562.28 1145,1520 ; v1(1400,1805) 1422,1827 1692,1827 1705,1840 1705,1900 1740,1935 2200,1935 C26.1@2235,1900 ; J9.2@1425,165 J9.2 1475,125 2290,125 2340,175 J10.1 ; C26.1 J8.3@2325,1895
  Top Layer w40: J9.2 1435,600 1460,625 v2(1460,685) ; C29.1@1435,295 R39.2
  Bottom Layer w10: v1(1145,1190) C17.1@1195,1190 ; C16.1 v1(1815,1420) ; v1(2060,995) 2100,955 2240,955 2270,925 2270,650 J10.1 ; R35.2 2245,1895 2260,1880 J8.3
  Bottom Layer w20: v1(715,705) 980,705 1015,740 v1(1015,750) ; v1(1095,1630) 1315,1630 1365,1680 1365,1770 v1(1400,1805) 1400,1835 1375,1860 1165,1860 JP11.6
  Bottom Layer w40: v2(1460,685) v2(1460,840)
  other v3: 1145,830 1145,900
V_SIG: J8.2 R35.1 Ub1.15 | length 998
  Top Layer w10: Ub1.15 1472.2,1637.2 v1(1500,1665)
  Bottom Layer w10: v1(1500,1665) 1530,1695 1640,1695 1700,1755 1925,1755 1995,1825 2200,1825 R35.1@2225,1800 ; R35.1 2280,1800 2300,1780 J8.2
VDDPLL: C23.1 C24.1 C25.1 Ub1.43 | length 531.8
  Top Layer w10: v1(985,1190) 1010,1190 1032.8,1167.2 Ub1.43
  Bottom Layer w10: C24.1@815,1030 780,995 780,895 820,855 C25.1 ; C24.1@825,1060 865,1100 880,1100 915,1135 C23.1 960,1190 v1(985,1190)
VIDEO_IN1: J2.2 pad.0@895,490 R1.1 R2.2 Ub1.67 | length 1853.7
  Top Layer w10: R2.2@160,640 J2.2 105,585 105,520 140,485 665,485 690,460 865,460 915,510 1230.43,510 1395.43,675 Ub1.67 ; R2.2 R1.1
VIDEO_IN2: J3.2 pad.1@965,460 R4.1 R5.2 Ub1.68 | length 1899.1
  Top Layer w10: J3.2@55,305 J3.2 ; R5.2@160,310 J3.2 ; R5.2 R4.1 ; Ub1.68 1421.02,661.02 1240,480 985,480 940,435 670,435 640,465 145,465 100,420 100,360 J3.2
VS_SIG1: RP1.4 U2.3 Ub1.9 | length 2456.3
  Top Layer w10: U2.3 544.95,634.95 565,655 615,655 650,620 650,565 675,540 v2(755,540) ; RP1.4 1605,1700 1625.75,1679.25 1625.75,1525.75 ; v1(1625,1475) Ub1.9@1625,1592.64
  Bottom Layer w10: v2(755,540) 1535,540 1625,630 v1(1625,1475)
VS_SIG2: RP1.2 U3.3 Ub1.11 | length 2513.2
  Top Layer w10: U3.3 544.95,249.95 580,285 v2(680,285) ; RP1.2@1530,1760 1530,1716.72 1574.57,1672.15 1574.57,1539.57 1550,1515 v1(1550,1450)
  Bottom Layer w10: v2(680,285) 700,305 700,570 745,615 1500,615 1550,665 v1(1550,1450)
XFC: C24.2 R30.1 Ub1.44 | length 322.2
  Top Layer w10: v1@988.39,1141.61 Ub1.44
  Bottom Layer w10: R30.1@915,935 915,1055 960,1100 960,1120 v1(985,1145)
XTAL: Ub1.47
pads on no net: JP1.0 JP11.3 JP11.5 U2.5 U3.5 Ub1.19 Ub1.20 Ub1.39 Ub1.45 Ub1.53 Ub1.54 Ub1.98 Ub1.99 Ub1.108 Y1.1

## Polygon pours and split planes (outlines as drawn)
DGND on Top Layer (hatched 90Degree grid 10 track 10, remove dead copper): 1170,265 1335,265 1360,290 1360,515 1345,530 1325,530 1220,425 1170,425 1155,410 1155,280
V+5D on Top Layer (hatched 90Degree grid 10 track 10, remove dead copper): 1140,795 1100,835 1100,1525 1140,1565 1830,1565 1870,1525 1870,835 1830,795
DGND on Bottom Layer (hatched 90Degree grid 10 track 10, remove dead copper): 2395,100 0,100 0,1965 2400,1965 2400,100
AGND on Bottom Layer (hatched 90Degree grid 10 track 10, remove dead copper): 0,100 785,100 785,690.45 650,815 0,815

## Keep-outs
Keep-Out Layer:
  lines w10: 0,100 0,1765 200,1965 2400,1965 2400,105 2395,100 0,100

## Other copper
Top Layer:
  text "AETC-ZXC" at 1965,235 h36
  text "NO" at 1965,170 h36

## Silkscreen, mask and mechanical layers (free items; w line width, h text height)
Top Overlay:
  rectangle: 2040,170 2245,210
  lines w6: 2205,1535 2240,1500 2240,1490 2245,1495
  text "+" at 2290,1930 h36 r270
  text "GND" at 255,1890 h36
  text "PK3" at 2135,1825 h36 r90
  text "Vsensor" at 2235,1760 h36 r270
  text "PK0" at 1770,1715 h36 r90
  text "PK1" at 1865,1715 h36 r90
  text "PK2" at 1960,1715 h36 r90
  text "DGND" at 2320,1635 h36 r270
  text "PB0" at 370,1600 h36
  text "PWM0" at 2075,1535 h36
  text "PWM1" at 1960,1440 h36
  text "PWM3" at 1960,1330 h36
  text "PB7" at 370,1320 h36
  text "PA0" at 370,1275 h36
  text "PWM5" at 1960,1215 h36
  text "RCAN" at 2050,1175 h36 r270
  text "PWM6" at 2250,1080 h36 r270
  text "DGND" at 2325,1075 h36 r270
  text "TCAN" at 2190,1060 h36 r270
  text "PA7" at 370,995 h36
  text "TXD" at 2175,865 h36
  text "RXD" at 2180,770 h36
  text "GND" at 2180,660 h36
  text "L1" at 820,565 h36
  text "V+5" at 2180,565 h36
  text "F1" at 685,525 h36
  text "av1" at 930,500 h36
  text "av1" at 10,450 h36
  text "av2" at 1000,440 h36
  text "av2" at 5,370 h36
  text "L2" at 685,325 h36
  text "F2" at 710,270 h36
  text "GND" at 1265,220 h36
  text "V+5" at 1385,215 h36
  text "AGND" at 655,190 h36
  text "GND" at 1765,165 h36

## Text inside footprints (layer, text, board x,y; h text height)
C31: Top Overlay "-" at 1795,295 h20; Top Overlay "+" at 1772,295 h20
JP11: Top Overlay "1" at 1395,1930 h36 r180; Top Overlay "2" at 1415,1830 h36 r180; Top Overlay "5" at 1055,1930 h36 r180; Top Overlay "6" at 1055,1830 h36 r180